# Altium PCB SensorNode.PcbDoc (part 1 of 2)
Units mil, origin at the board's own origin, x right, y up, seen from the top; angles counter-clockwise.
Board outline 2244.09 x 2204.72 mil, 4 copper layers (Top Copper, POWER, GND, Bottom Copper), stack 61.811 mil thick; 83 components, 70 nets, 369 pads, 414 vias.
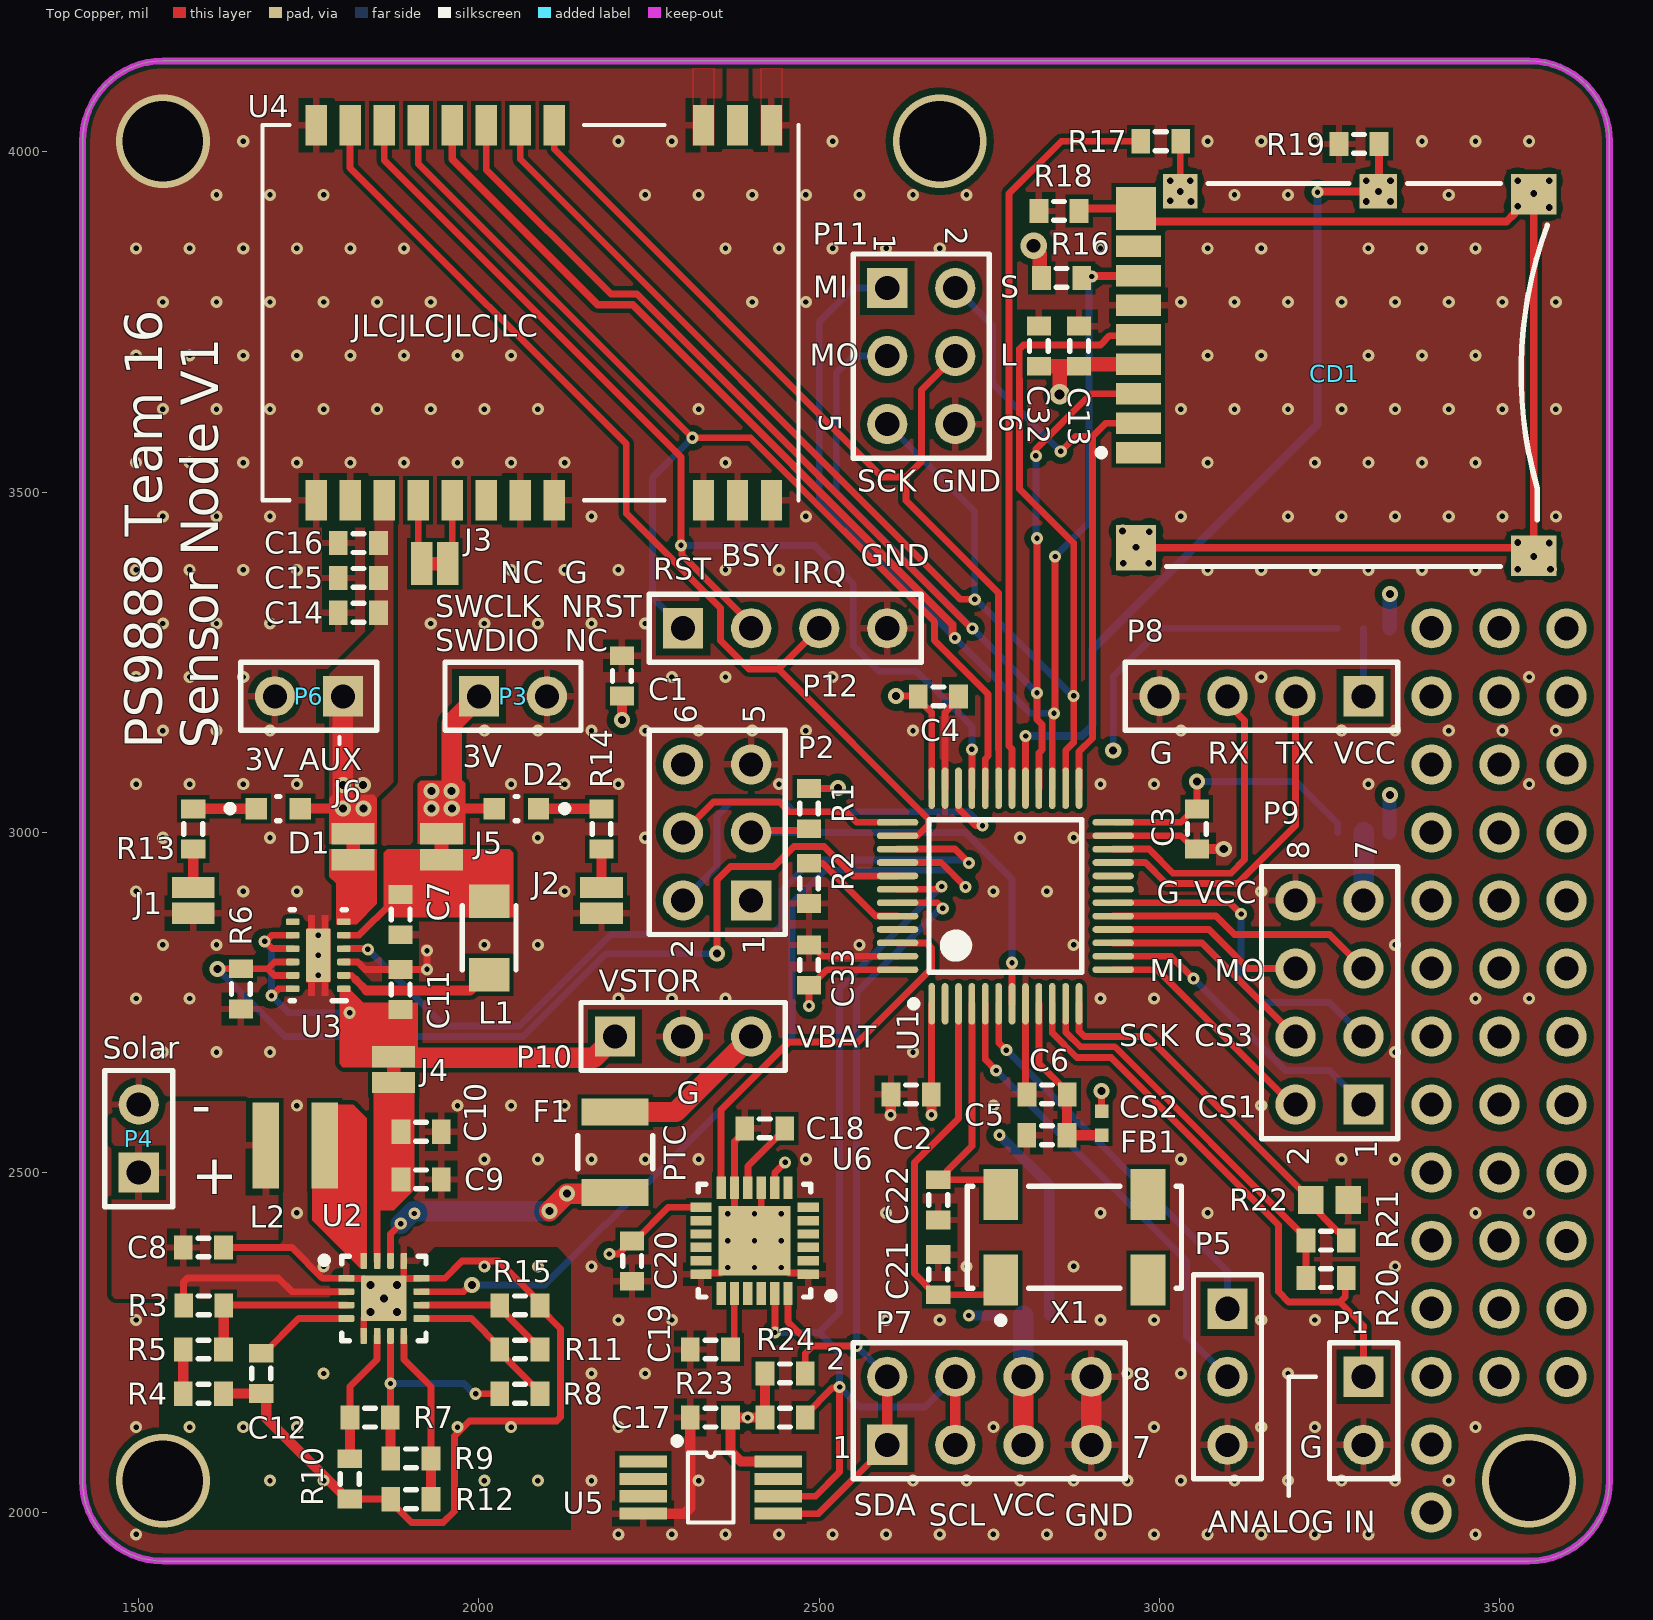
[diagram p0: Top Copper view]
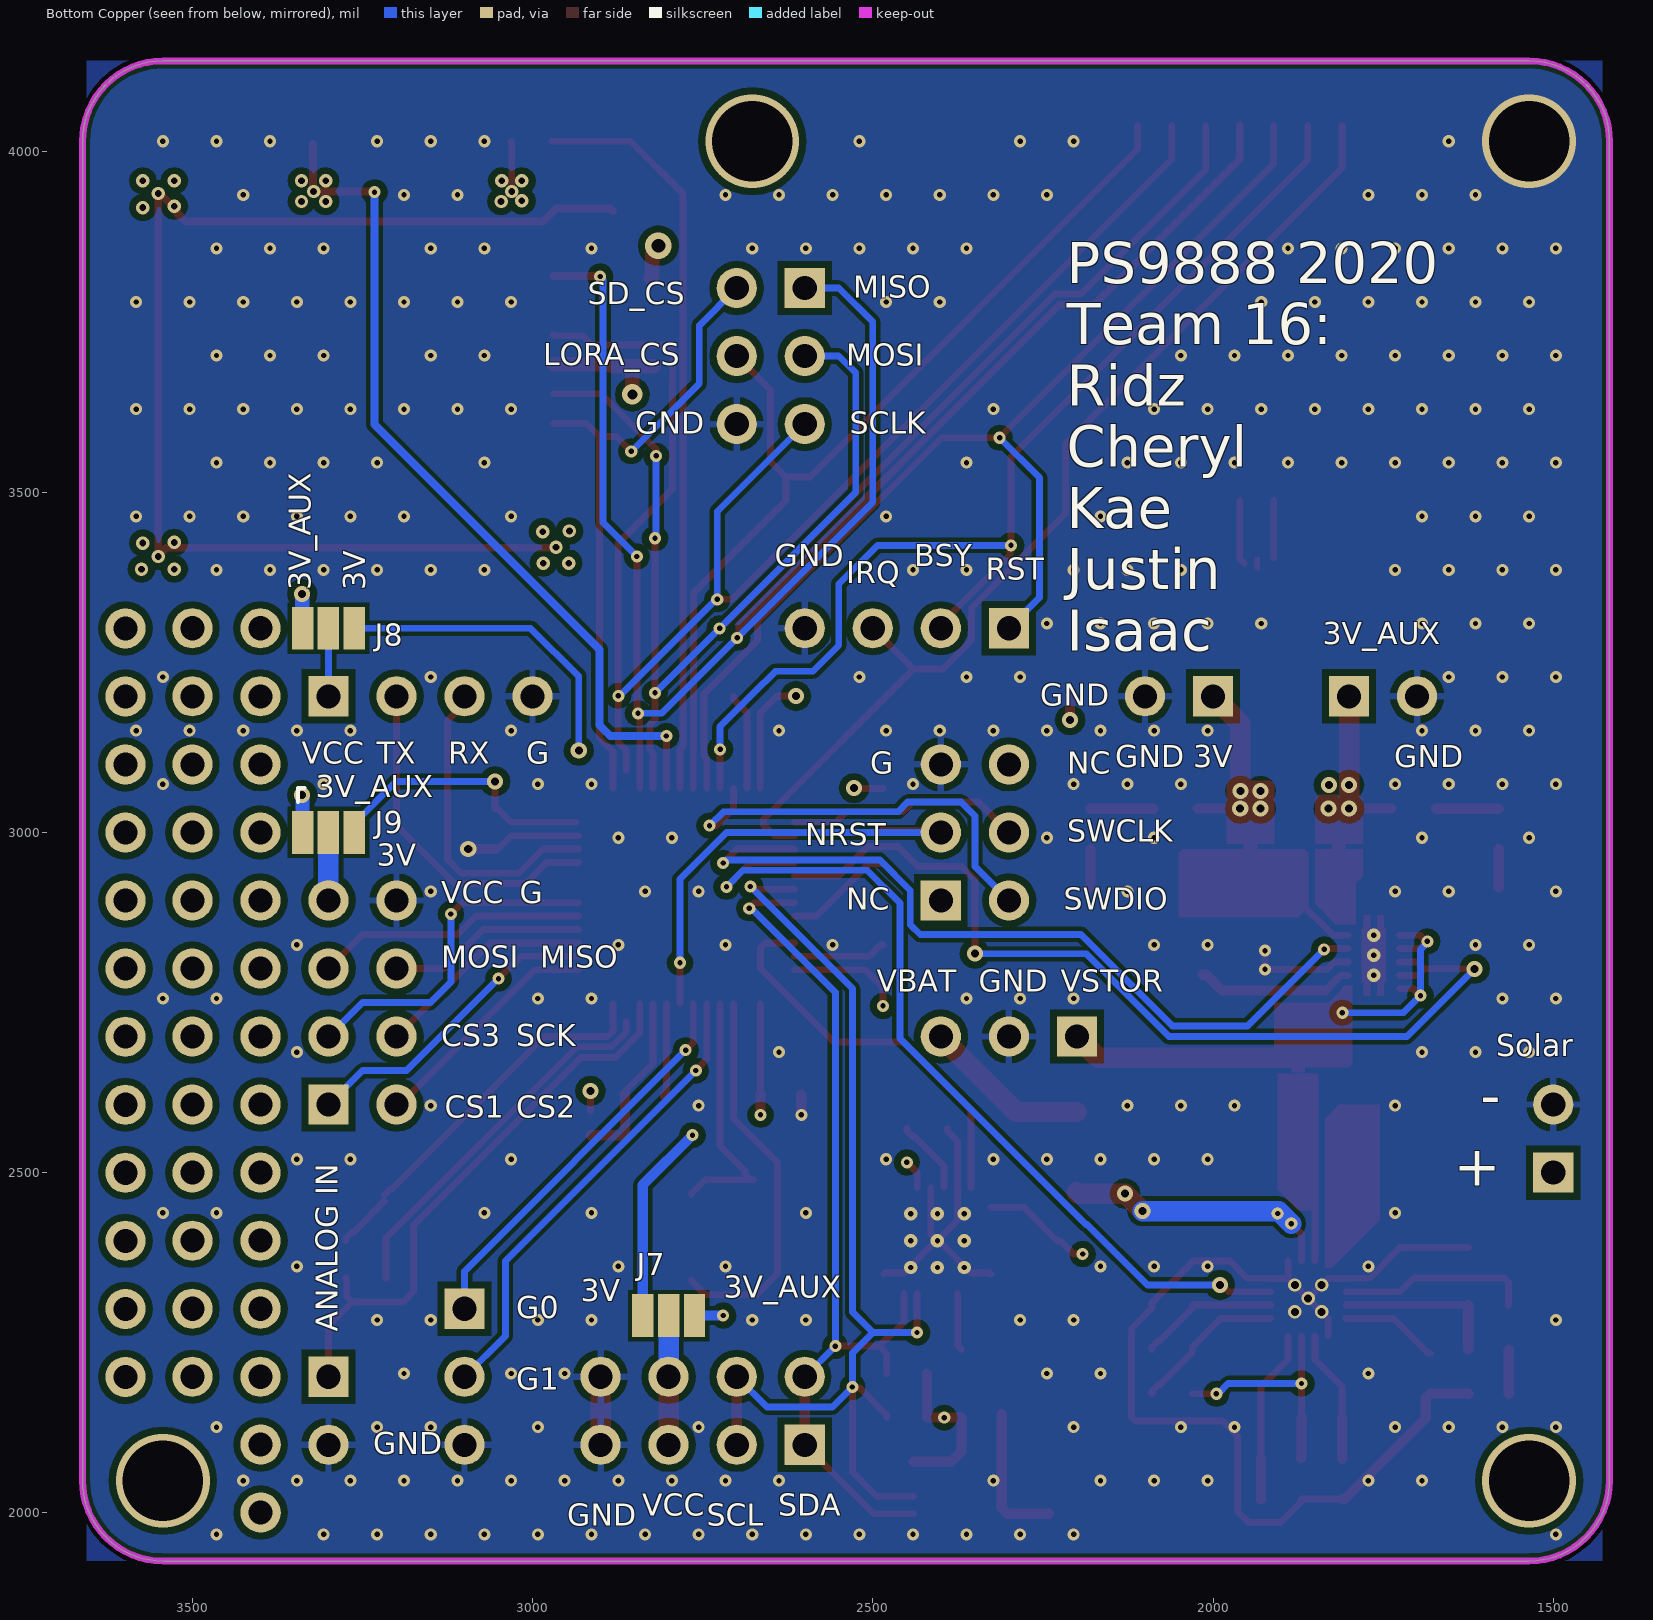
[diagram p1: Bottom Copper view, seen from below]
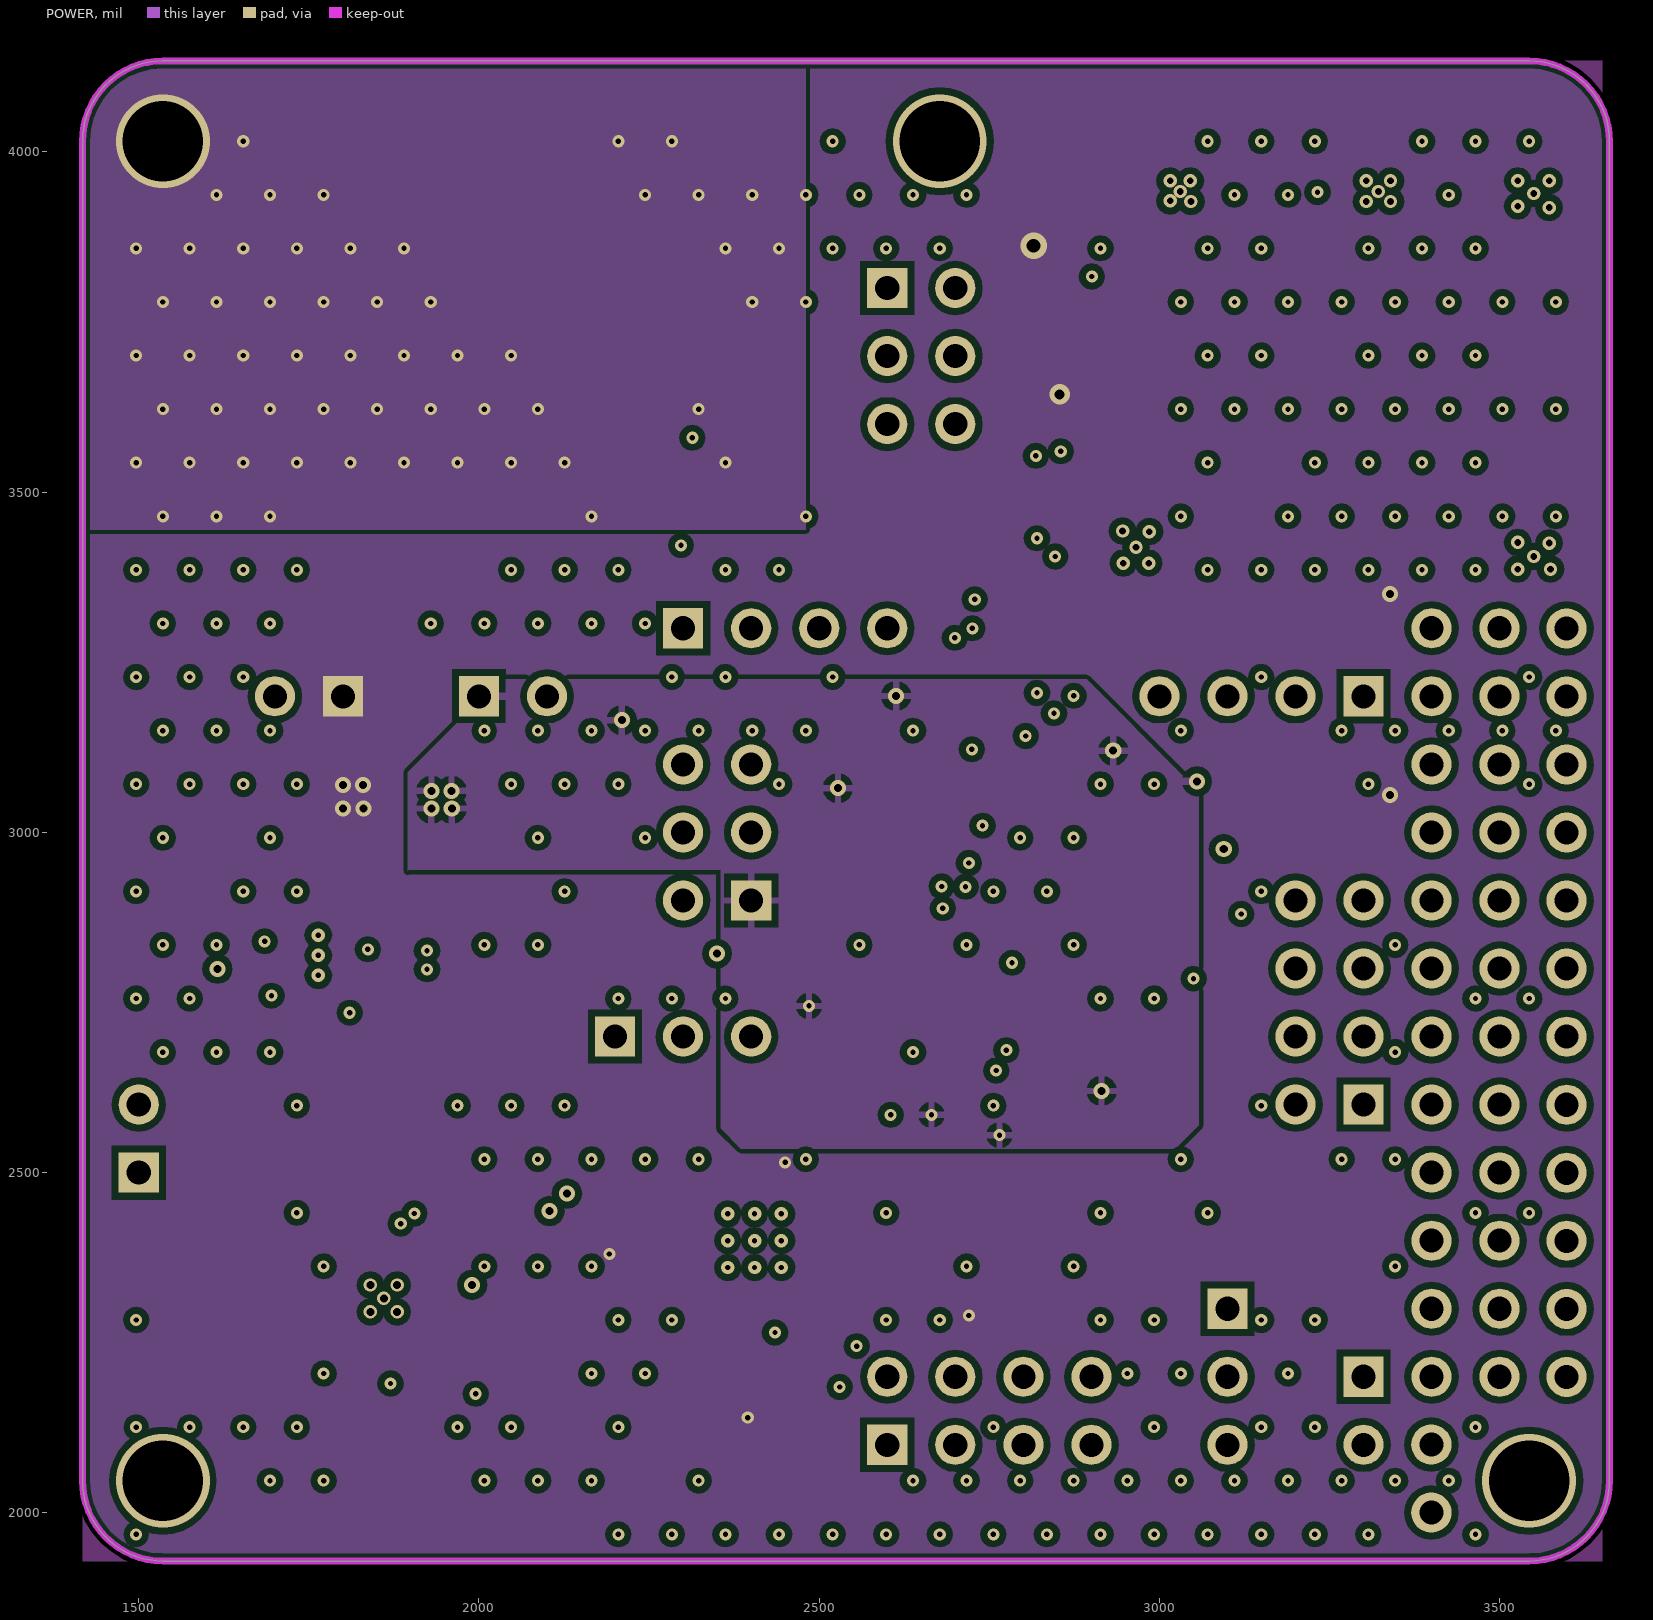
[diagram p2: POWER]
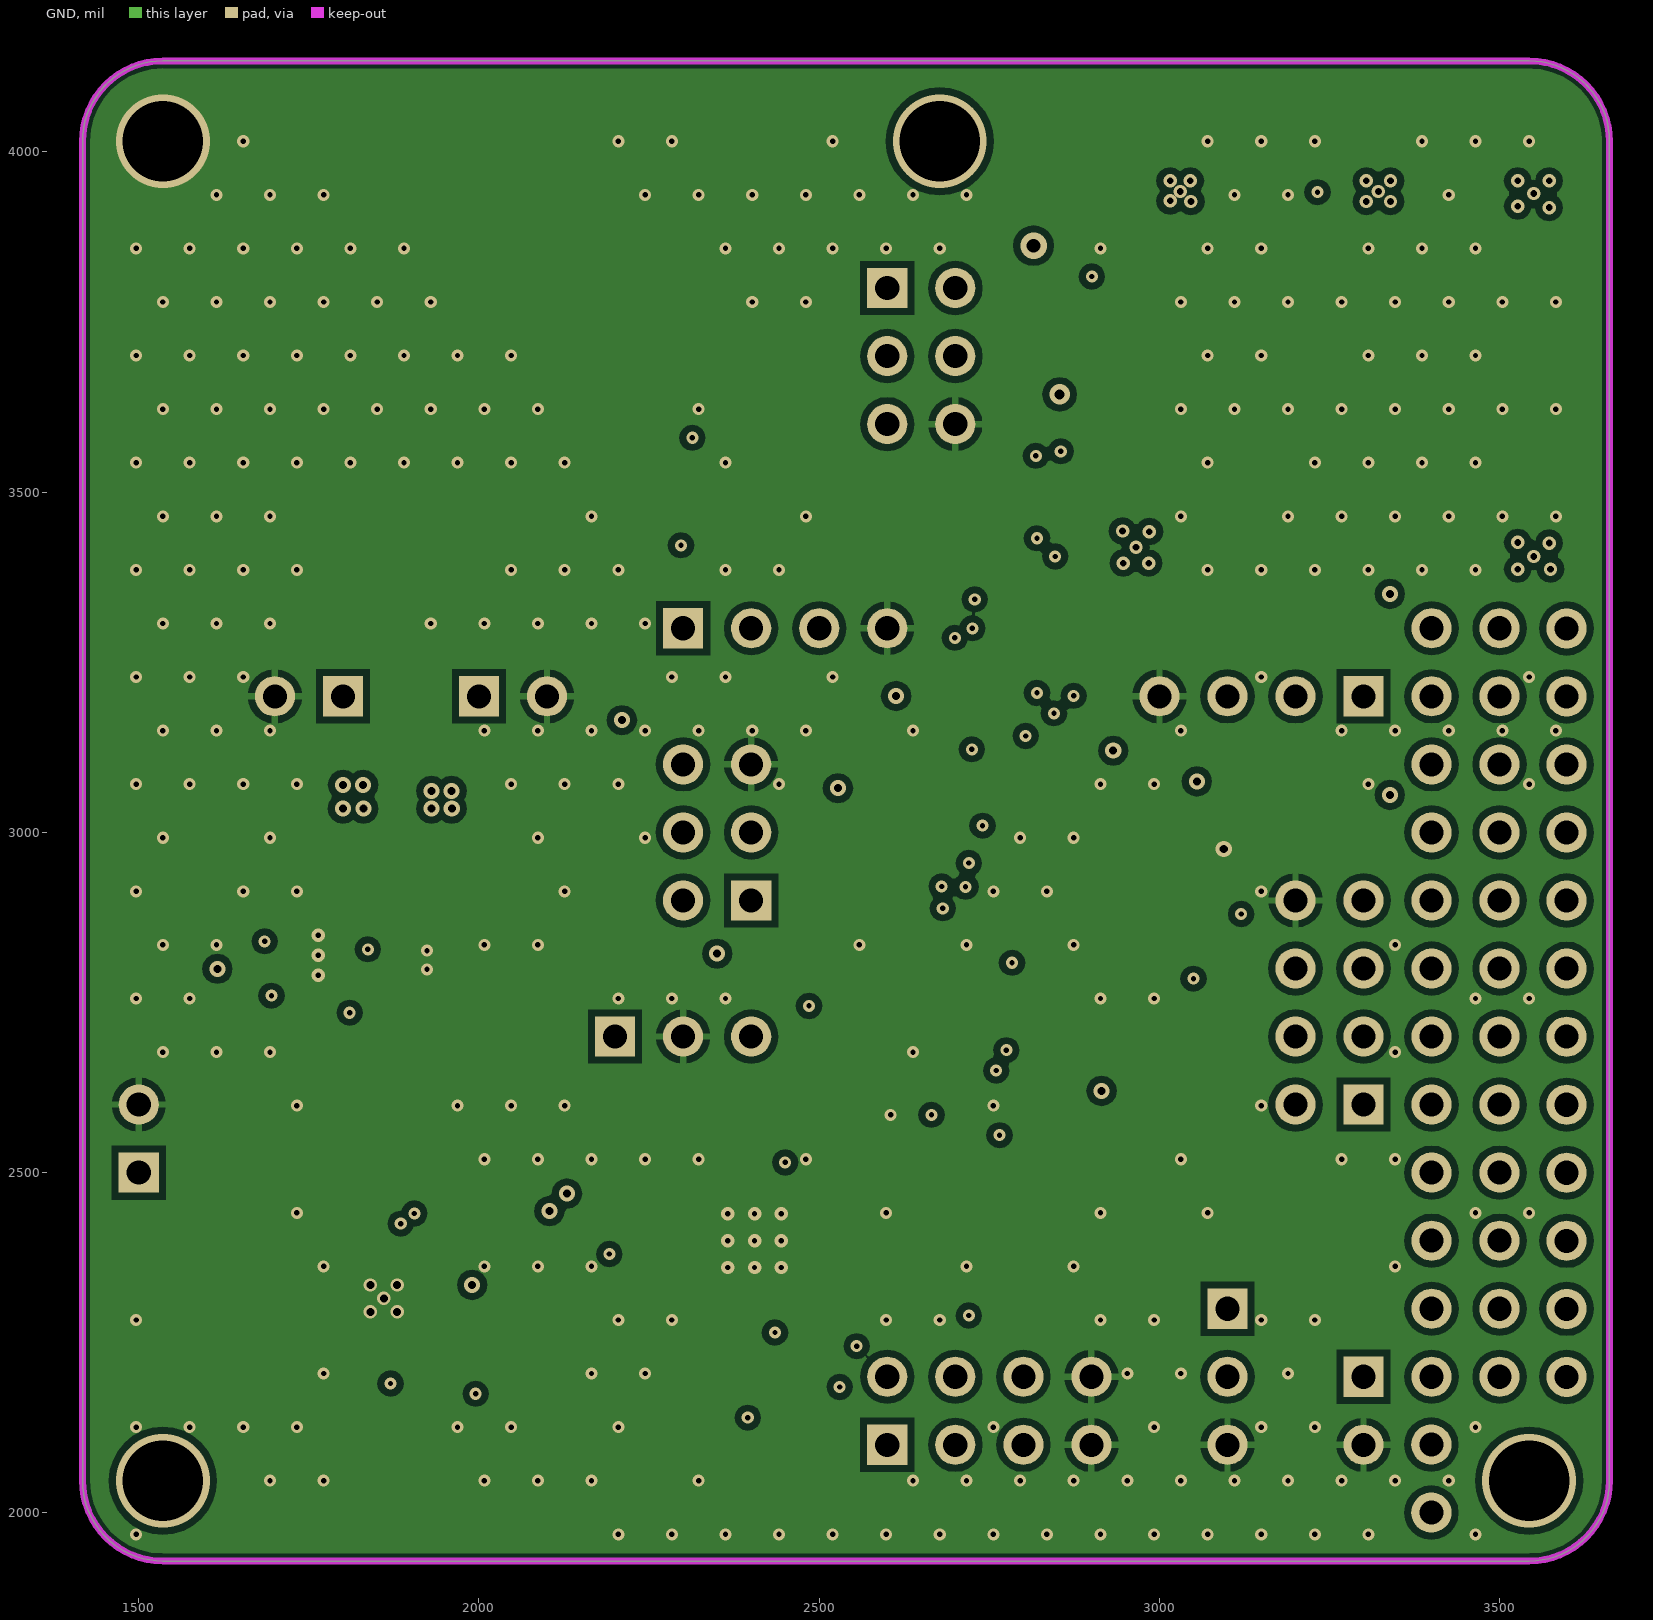
[diagram p3: GND]

## Layer stack, top to bottom
Top Mask: solder mask 0.5906, Solder Resist, Dk 3.8
Top Copper: signal copper 1.378
Dielectric 1: prepreg 7.874, 7628, Dk 4.6
POWER: signal copper 0.689
Core: core 41.9291, FR-4, Dk 4.5
GND: signal copper 0.689
Dielectric 2: prepreg 7.874, 7628, Dk 4.6
Bottom Copper: signal copper 1.378
Bottom Mask: solder mask 0.5906, Solder Resist, Dk 3.8

## Board outline
1535.43,1929.13 cw(c1535.43,2047.24) 1417.32,2047.24 1417.32,4015.75 cw(c1535.43,4015.75) 1535.43,4133.86 3543.31,4133.86 cw(c3543.31,4015.75) 3661.42,4015.75 3661.42,2047.24 cw(c3543.31,2047.24) 3543.31,1929.13

## Design rules (kind name [scope] priority, off if disabled: settings)
Clearance [All] p1: gap=10 ignorepadtopadclearanceinfootprint=FALSE except(0: Arc-Hole Track-Hole SMDPad-Hole THPad-Hole Via-Hole Fill-Hole Poly-Hole Region-Hole Text-Hole; 5: Arc-Arc Arc-Track Track-Track; 5.91: SMDPad-SMDPad; 6: Arc-SMDPad Arc-Fill Arc-Poly Arc-Region Track-SMDPad Track-Fill Track-Poly Track-Region SMDPad-Fill SMDPad-Poly SMDPad-Region Fill-Fill Fill-Poly Fill-Region Poly-Poly Poly-Region Region-Region)
HoleSize [All] p1: absolutevalues=TRUE maxlimit=157.48 minlimit=0.98 maxpercent=80.000 minpercent=20.000
MinimumAnnularRing MinimumAnnularRing_1 [IsVia] p1: minimumring=4.88
MinimumAnnularRing [IsPad] p2: minimumring=7.87
MinimumSolderMaskSliver [All] p1 off: minsoldermaskwidth=3.94
PasteMaskExpansion [(HasFootprint('Jumper (Close)') OR HasFootprint('Jumper (Open)') OR HasFootprint('Jumper-3 (Open)'))] p1: expansion=-118.11
PasteMaskExpansion PasteMaskExpansion_1 [All] p2: expansion=0
PolygonConnect PolygonConnect_5 [IsVia vs InNet('GND')] p1: connectstyle=Direct reliefconductorwidth=10 reliefentries=4 polygonreliefangle="90 Angle" airgapwidth=10
PolygonConnect PolygonConnect_2 [InNet('ANT')] p2: connectstyle=Direct reliefconductorwidth=10 reliefentries=4 polygonreliefangle="90 Angle" airgapwidth=10
PolygonConnect PolygonConnect_4 [InNet('GND')] p3 off: connectstyle=Direct reliefconductorwidth=10 reliefentries=4 polygonreliefangle="90 Angle" airgapwidth=10
PolygonConnect PolygonConnect_3 [InNet('3V_AUX')] p4: connectstyle=Direct reliefconductorwidth=10 reliefentries=4 polygonreliefangle="90 Angle" airgapwidth=10
PolygonConnect PolygonConnect_1 [InNet('NetIC1_9') Or InNet('NetC30_2')] p5: connectstyle=Direct reliefconductorwidth=10 reliefentries=4 polygonreliefangle="90 Angle" airgapwidth=10
PolygonConnect [All] p6: connectstyle=Relief reliefconductorwidth=10 reliefentries=4 polygonreliefangle="90 Angle" airgapwidth=10
RoomDefinition "U_Sensor Ports" [InComponentClass('U_Sensor Ports')] p1: confinementstyle=ConfineIn formatcopy=TRUE lockcomponents=FALSE outline 2200,1950 3380,1950 3380,3891.73 2200,3891.73
RoomDefinition U_Power [InComponentClass('U_Power')] p2: confinementstyle=ConfineIn formatcopy=TRUE lockcomponents=FALSE outline 1445.87,1996.06 2485,1996.06 2485,3355 1445.87,3355
RoomDefinition U_mcu [InComponentClass('U_mcu')] p3: confinementstyle=ConfineIn formatcopy=TRUE lockcomponents=FALSE outline 2100,1970 3380,1970 3380,3975 2100,3975
RoomDefinition "U_SD Card" [InComponentClass('U_SD Card')] p4: confinementstyle=ConfineIn formatcopy=TRUE lockcomponents=FALSE outline 2482.28,3370 3594.49,3370 3594.49,4040.35 2482.28,4040.35
RoomDefinition U_Transceiver [InComponentClass('U_Transceiver')] p5: confinementstyle=ConfineIn formatcopy=TRUE lockcomponents=FALSE outline 1653.54,4114.17 1653.54,3277.56 2910,3277.56 2910,4114.17
RoutingVias [All] p1: holewidth=7.87 width=17.72 viastyle="Through Hole" minholewidth=7.87 minwidth=17.72 maxholewidth=23.62 maxwidth=39.37
SilkToSilkClearance [All] p1 off: silktosilkclearance=10
SilkToSolderMaskClearance [IsPad] p1: minsilkscreentomaskgap=3.94 clearancetoexposedcopper=TRUE
SolderMaskExpansion SolderMaskExpansion_1 [All] p1: expansion=4 istentingtop=FALSE
SolderMaskExpansion [IsVia] p2: expansion=4 istentingtop=TRUE
Width [All] p1: maxlimit=30 minlimit=5 preferedwidth=15 midlayer1_minwidth=10 midlayer1_maxwidth=10 midlayer1_prefwidth=10 midlayer2_minwidth=10 midlayer2_maxwidth=10 midlayer2_prefwidth=10 minimp=50.000000 maximp=50.000000 favimp=50.000000
25 further rules are at their usual default settings.

## Classes and differential pairs
component class U_Transceiver: C14 C15 C16 J3 U4
component class "U_Sensor Ports": C18 C19 C20 J7 J8 J9 P1 P7 P8 P9 R20 R21 R22 U6
component class "U_SD Card": C13 C32 CD1 R16 R17 R18 R19
component class U_Power: C7 C8 C9 C10 C11 C12 D1 D2 F1 J1 J2 J4 J5 J6 L1 L2 P3 P4 P6 P10 R3 R4 R5 R6 R7 R8 R9 R10 R11 R12 R13 R14 R15 U2 U3
component class U_mcu: C1 C2 C3 C4 C5 C6 C17 C21 C22 C33 FB1 P2 P5 P11 P12 R1 R2 R23 R24 U1 U5 X1

## Components (designator, comment, footprint, x,y, rotation, side; value= is the part's Value field where it differs from the comment)
C1 "Cap" "0603 (1608M)" 2210,3230 r270 top value=10uF
C2 "Cap" "0603 (1608M)" 2635,2615 r0 top value=100nF
C3 "Cap" "0603 (1608M)" 3055,3005 r90 top value=100nF
C4 "Cap" "0603 (1608M)" 2675,3200 r180 top value=100nF
C5 "Cap" "0603 (1608M)" 2834.53,2555 r0 top value=1uF
C6 "Cap" "0603 (1608M)" 2835,2615 r0 top value=100nF
C7 "Cap" "0603 (1608M)" 1884.84,2879.13 r90 top value=10uF
C8 "Cap" "0603 (1608M)" 1595,2390 r180 top value=4.7uF
C9 "Cap" "0603 (1608M)" 1915,2490 r180 top value=100nF
C10 "Cap" "0603 (1608M)" 1915,2560 r180 top value=4.7uF
C11 "Cap" "0603 (1608M)" 1884.84,2769.13 r270 top value=10uF
C12 "Cap" "0603 (1608M)" 1680,2205 r90 top value=10nF
C13 "Cap" "0603 (1608M)" 2881.89,3714.57 r270 top value=100nF
C14 "Cap" "0603 (1608M)" 1822.83,3322.83 r0 top value=1uF
C15 "Cap" "0603 (1608M)" 1822.83,3374.02 r0 top value=100nF
C16 "Cap" "0603 (1608M)" 1822.83,3425.2 r0 top value=10nF
C17 "Cap" "0603 (1608M)" 2340,2140 r0 top value=10nF
C18 "Cap" "0603 (1608M)" 2420,2565 r0 top value=100nF
C19 "Cap" "0603 (1608M)" 2340,2240 r0 top value=2.2nF
C20 "Cap" "0603 (1608M)" 2225,2370 r90 top value=100nF
C21 "Cap" "0603 (1608M)" 2675,2350 r270 top value=6pF
C22 "Cap" "0603 (1608M)" 2675,2460 r90 top value=6pF
C32 "Cap" "0603 (1608M)" 2822.83,3714.57 r270 top value=10uF
C33 "Cap" "0603 (1608M)" 2485,2805 r270 top value=100nF
CD1 "502774-0891" MOLX-502774-0891_V 3259.84,3672.24 r90 top
D1 "SML-D12P8WT86" FP-SML-D12-MFG 1705,3035 r0 top
D2 "SML-D12P8WT86" FP-SML-D12-MFG 2055,3035 r180 top
F1 "1210L020WR" FP-1210L-MFG 2200,2530 r270 top value=0.8-5Ω
FB1 "BLM15GG221SN1D" MURA-BLM15-CHIP-2_V 2915,2572.72 r90 top
J1 "Open Jumper" "Jumper (Open)" 1580,2900 r90 top
J2 "Open Jumper" "Jumper (Open)" 2180,2900 r90 top
J3 "Closed Jumper" "Jumper (Close)" 1935,3395 r0 top net-tie
J4 "Closed Jumper" "Jumper (Close)" 1874.48,2651.44 r90 top net-tie
J5 "Closed Jumper" "Jumper (Close)" 1944.86,2978.84 r90 top net-tie
J6 "Closed Jumper" "Jumper (Close)" 1815.03,2978.84 r90 top net-tie
J7 "3 Way Open Jumper" "Jumper-3 (Open)" 2800,2290 r180 bottom
J8 "3 Way Open Jumper" "Jumper-3 (Open)" 3300,3300 r0 bottom
J9 "3 Way Open Jumper" "Jumper-3 (Open)" 3300,3000 r0 bottom
L1 "74479787222" SMD-1008 2015,2845 r90 top
L2 "744025220" "WE-TPC 2828" 1730,2540 r0 top locked
P1 "Header 2" HDR1X2 3300,2200 r270 top
P2 "SWD" HDR2X3 2400,2900 r90 top locked
P3 "3V" HDR1X2 2000,3200 r0 top
P4 "Solar Panel Input" HDR1X2 1500,2500 r90 top
P5 "GPIO" HDR1X3 3100,2300 r270 top
P6 "3V_AUX" HDR1X2 1800,3200 r180 top
P7 "I2C" HDR2X4 2600,2100 r0 top
P8 "UART" HDR1X4 3300,3200 r180 top
P9 "Header 4X2" HDR2X4 3300,2600 r90 top
P10 "VIN" HDR1X3 2200,2700 r0 top
P11 "SPI_DEBUG" HDR2X3 2600,3800 r270 top
P12 "Header 4" HDR1X4 2300,3300 r0 top
R1 "Resistor" "0603 (1608M)" 2485,3035 r270 top value=10k
R2 "Resistor" "0603 (1608M)" 2485,2925 r90 top value=10k
R3 "Resistor" "0603 (1608M)" 1595.47,2305 r180 top value=3.92M
R4 "Resistor" "0603 (1608M)" 1595,2175 r180 top value=10M
R5 "Resistor" "0603 (1608M)" 1595,2240 r0 top value=5.9M
R6 "Resistor" "0603 (1608M)" 1650,2770 r90 top value=10k
R7 "Resistor" "0603 (1608M)" 1840,2140 r0 top value=5.62M
R8 "Resistor" "0603 (1608M)" 2060,2175 r180 top value=680k
R9 "Resistor" "0603 (1608M)" 1900,2080 r180 top value=6.19M
R10 "Resistor" "0603 (1608M)" 1810,2050 r90 top value=4.53M
R11 "Resistor" "0603 (1608M)" 2060,2240 r180 top value=6.04M
R12 "Resistor" "0603 (1608M)" 1900,2020 r0 top value=3.74M
R13 "Resistor" "0603 (1608M)" 1580,3005 r90 top value=1k
R14 "Resistor" "0603 (1608M)" 2180,3005 r90 top value=1k
R15 "Resistor" "0603 (1608M)" 2060,2305 r180 top value=3.4M
R16 "Resistor" "0603 (1608M)" 2856.3,3814.96 r180 top value=DNP
R17 "Resistor" "0603 (1608M)" 3001.97,4015.75 r0 top value=1k
R18 "Resistor" "0603 (1608M)" 2852.36,3913.39 r0 top value=DNP
R19 "Resistor" "0603 (1608M)" 3293.31,4011.81 r0 top value=DNP
R20 "Resistor" "0603 (1608M)" 3245,2345 r180 top value=4.7k
R21 "Resistor" "0603 (1608M)" 3245,2400 r180 top value=4.7k
R22 "ERT-J1VR103J" RESC1608X90X30ML15T20 3250,2460 r180 top
R23 "Resistor" "0603 (1608M)" 2450,2140 r180 top value=1.5k
R24 "Resistor" "0603 (1608M)" 2450,2205 r180 top value=1.5k
U1 "STM32L051C8T6" STM-LQFP48_L 2773.58,2906.54 r90 top
U2 "BQ25504RGTT" RGT0016C_V 1860.12,2315.16 r0 top
U3 "TPS62740DSST" DSS0012A_V 1763.76,2819.37 r180 top
U4 "E22-900M22S" E22-900M22S 2469.29,3488.19 r90 top locked
U5 "M24M01" TSSOP-8 2241.18,2075.59 r0 top
U6 "MPU6050" INSE-QFN-24_V 2405,2400 r180 top
X1 "ABS25-32.768KHZ-6-T" ABRA-ABS25-4_V 2875,2405 r0 top

## Footprints (in the part's own frame and the unit in brackets; to place one, negate y for a bottom-side part, rotate by r counter-clockwise, add the part's x,y. Pads: shape width x height; smd on the part's side, far side on the other; paste and mask are expansions set on the pad)
"0603 (1608M)" [mm] "Chip Resistor, Body 1.6x0.8mm, IPC High Density"
  rect 0.7x0.9 smd: 1(-0.75,0) 2(0.75,0)
  silkscreen extent -0.2,-0.35 0.2,0.35, body extent -0.85,-0.48 0.85,0.48, height 0.9
ABRA-ABS25-4_V [mm] "SMD, 4-Leads, Body 8x3.8mm, Pitch 5.5mm, Height 2.5mm"
  rect 1.3x1.9 smd: 1(-2.75,-1.6) 2(2.75,-1.6) 3(2.75,1.6) 4(-2.75,1.6)
  silkscreen extent -4,-3.22 4,1.9, body extent -4,-2 4,2, height 2.66
DSS0012A_V [mm] "SON, 12-Leads, Body 2x3mm, Pitch 0.5mm, Thermal Pad 2x0.9mm, TI Recommended"
  rrect40% 0.5x0.25 smd: 1(-0.95,1.25) 2(-0.95,0.75) 3(-0.95,0.25) 4(-0.95,-0.25) 5(-0.95,-0.75) 6(-0.95,-1.25) 7(0.95,-1.25) 8(0.95,-0.75) 9(0.95,-0.25) 10(0.95,0.25) 11(0.95,0.75) 12(0.95,1.25)
  rrect11% 0.9x2 smd paste-0.45: 13(0,0)
  Top Copper region: -0.375,-1.5 -0.375,-1 -0.45,-1 -0.45,1 -0.375,1 -0.375,1.5 -0.125,1.5 -0.125,1 0.125,1 0.125,1.5 0.375,1.5 0.375,1 0.45,1 0.45,-1 0.375,-1 0.375,-1.5 0.125,-1.5 0.125,-1 -0.125,-1 -0.125,-1.5
  silkscreen extent -1.05,-1.7 1.05,1.7, body extent -1,-1.5 1,1.5, height 0.8
E22-900M22S [mm]
  rect 1.5x0.8 smd: 1(0,1) 2(0,2.27) 3(0,3.54) 4(0,9.11) 5(0,10.38) 6(0,11.65) 7(0,12.92) 8(0,14.19) 9(0,15.46) 10(0,16.73) 11(0,18) 12(14,18) 13(14,16.73) 14(14,15.46) 15(14,14.19) 16(14,12.92) 17(14,11.65) 18(14,10.38) 19(14,9.11) 20(14,3.54) 21(14,2.27) 22(14,1)
  silkscreen extent 0,0 14,20
FP-1210L-MFG [mm]
  rect 1x2.5 smd paste+0 mask+0: 1(-1.5,0) 2(1.5,0)
  silkscreen extent -0.63,-1.4 0.63,1.4, body extent -2.1,-1.5 2.1,1.5, height 0.25
FP-SML-D12-MFG [mm]
  rect 0.8x0.8 smd paste+0 mask+0: 1(-0.825,0) 2(0.825,0)
  silkscreen extent -1.92,-0.45 0.05,0.45, body extent -1.33,-0.55 1.33,0.55, height 0.25
HDR1X2 [mm] "Connector; Header; 2 Position"
  rect 1.5x1.5 hole 0.9: 1(0,0)
  round 1.5 hole 0.9: 2(2.54,0)
  silkscreen extent -1.27,-1.27 3.81,1.27
HDR1X3 [mm] "Connector; Header; 3 Position"
  rect 1.5x1.5 hole 0.9: 1(0,0)
  round 1.5 hole 0.9: 2(2.54,0) 3(5.08,0)
  silkscreen extent -1.27,-1.27 6.35,1.27
HDR1X4 [mm] "Connector; Header; 4 Position"
  rect 1.5x1.5 hole 0.9: 1(0,0)
  round 1.5 hole 0.9: 2(2.54,0) 3(5.08,0) 4(7.62,0)
  silkscreen extent -1.27,-1.27 8.89,1.27
HDR2X3 [mm] "Connector; Header; 3x2 Position"
  rect 1.5x1.5 hole 0.9: 1(0,0)
  round 1.5 hole 0.9: 2(0,2.54) 3(2.54,0) 4(2.54,2.54) 5(5.08,0) 6(5.08,2.54)
  silkscreen extent -1.27,-1.27 6.35,3.81
HDR2X4 [mm] "Connector; Header; 4x2 Position"
  rect 1.5x1.5 hole 0.9: 1(0,0)
  round 1.5 hole 0.9: 2(0,2.54) 3(2.54,0) 4(2.54,2.54) 5(5.08,0) 6(5.08,2.54) 7(7.62,0) 8(7.62,2.54)
  silkscreen extent -1.27,-1.27 8.89,3.81
INSE-QFN-24_V [mm] "QFN, 24-Leads, Body 4.00x4.00mm, Pitch 0.50mm, Thermal Pad 2.7x2.6mm"
  rect 0.8x0.35 smd: 1(-2,1.25) 2(-2,0.75) 3(-2,0.25) 4(-2,-0.25) 5(-2,-0.75) 6(-2,-1.25) 13(2,-1.25) 14(2,-0.75) 15(2,-0.25) 16(2,0.25) 17(2,0.75) 18(2,1.25)
  rect 0.35x0.85 smd: 7(-1.25,-1.975) 8(-0.75,-1.975) 9(-0.25,-1.975) 10(0.25,-1.975) 11(0.75,-1.975) 12(1.25,-1.975) 19(1.25,1.975) 20(0.75,1.975) 21(0.25,1.975) 22(-0.25,1.975) 23(-0.75,1.975) 24(-1.25,1.975)
  rect 2.7x2.6 smd: 25(0,0)
  silkscreen extent -2.98,-2.1 2.1,2.17, body extent -2,-2 2,2, height 0.95
"Jumper (Close)" [mm]
  rect 0.8x1.6 smd: 1(-0.483,0) 2(0.483,0)
  Top Copper region: -0.102,-0.254 0.102,-0.254 0.102,0.254 -0.102,0.254
"Jumper (Open)" [mm]
  rect 0.8x1.6 smd: 1(-0.483,0) 2(0.483,0)
"Jumper-3 (Open)" [mm]
  rect 0.8x1.6 smd: 1(-0.965,0) 2(0,0) 3(0.965,0)
MOLX-502774-0891_V [mm] "SMD, 14-Leads, Body 15x14.3mm, Pitch 1.1mm"
  rect 0.8x1.68 smd: 1(-2.9,7.385) 2(-1.8,7.385) 3(-0.7,7.385) 4(0.4,7.385) 5(1.5,7.385) 6(2.6,7.385) 7(3.7,7.385) 8(4.8,7.385)
  rect 1.29x1.3 smd: 9(6.855,5.825)
  rect 1.29x1.4 smd: 10(6.855,-1.575)
  rect 1.5x1.7 smd: 11(6.75,-7.375) 12(-6.75,-7.375)
  rect 1.7x1.5 smd: 13(-6.45,7.475)
  rect 1.6x1.5 smd: 14(6.21,7.475)
  silkscreen extent -7.15,-7.88 7.15,8.9, body extent -7.15,-8 7.15,8, height 1.78
MURA-BLM15-CHIP-2_V [mm] "Chip Ferrite Bead, 2-Leads, Body 1x0.5mm"
  rect 0.5x0.5 smd: 1(-0.45,0) 2(0.45,0)
  body extent -0.52,-0.28 0.53,0.28, height 0.55
RESC1608X90X30ML15T20 [mm] "Chip Resistor, 2-Leads, Body 1.60x0.80mm, IPC Low Density"
  rect 0.95x1.05 smd: 1(-0.7,0) 2(0.7,0)
  body extent -0.88,-0.48 0.87,0.48, height 0.9
RGT0016C_V [mm] "QFN, 16-Leads, Body 3x3mm, Pitch 0.5mm, Thermal Pad 1.65x1.65mm"
  rrect40% 0.6x0.25 smd: 1(-1.4,0.75) 2(-1.4,0.25) 3(-1.4,-0.25) 4(-1.4,-0.75) 9(1.4,-0.75) 10(1.4,-0.25) 11(1.4,0.25) 12(1.4,0.75)
  rrect40% 0.25x0.6 smd: 5(-0.75,-1.4) 6(-0.25,-1.4) 7(0.25,-1.4) 8(0.75,-1.4) 13(0.75,1.4) 14(0.25,1.4) 15(-0.25,1.4) 16(-0.75,1.4)
  rrect6% 1.55x1.55 on Top Paste: 17(0,0)
  rrect6% 1.7x1.7 smd paste-0.85: 17(0,0)
  silkscreen extent -2.35,-1.57 1.57,1.58, body extent -1.5,-1.5 1.5,1.5, height 1
SMD-1008 [mm] "Chip Inductor, 2-Leads, Body 2.5x2.0x1.1 mm"
  rect 1.25x1.5 smd: 1(-1.375,0) 2(1.375,0)
  silkscreen extent -1.2,-1 1.2,1, body extent -1.25,-1 1.25,1, height 0.89
STM-LQFP48_L [mm] "QFP, 48-Leads, Body 7x7mm, Pitch 0.5mm, IPC High Density"
  oval 1.55x0.25 smd: 1(-4.025,2.75) 2(-4.025,2.25) 3(-4.025,1.75) 4(-4.025,1.25) 5(-4.025,0.75) 6(-4.025,0.25) 7(-4.025,-0.25) 8(-4.025,-0.75) 9(-4.025,-1.25) 10(-4.025,-1.75) 11(-4.025,-2.25) 12(-4.025,-2.75) 25(4.025,-2.75) 26(4.025,-2.25) 27(4.025,-1.75) 28(4.025,-1.25) 29(4.025,-0.75) 30(4.025,-0.25) 31(4.025,0.25) 32(4.025,0.75) 33(4.025,1.25) 34(4.025,1.75) 35(4.025,2.25) 36(4.025,2.75)
  oval 0.25x1.55 smd: 13(-2.75,-4.025) 14(-2.25,-4.025) 15(-1.75,-4.025) 16(-1.25,-4.025) 17(-0.75,-4.025) 18(-0.25,-4.025) 19(0.25,-4.025) 20(0.75,-4.025) 21(1.25,-4.025) 22(1.75,-4.025) 23(2.25,-4.025) 24(2.75,-4.025) 37(2.75,4.025) 38(2.25,4.025) 39(1.75,4.025) 40(1.25,4.025) 41(0.75,4.025) 42(0.25,4.025) 43(-0.25,4.025) 44(-0.75,4.025) 45(-1.25,4.025) 46(-1.75,4.025) 47(-2.25,4.025) 48(-2.75,4.025)
  silkscreen extent -4.15,-2.85 2.85,3.55, body extent -3.5,-3.5 3.5,3.5, height 1.6
TSSOP-8 [mm]
  rect 1.78x0.45 smd: 1(0,0) 2(0,-0.65) 3(0,-1.3) 4(0,-1.95) 5(5.05,-1.95) 6(5.05,-1.3) 7(5.05,-0.65) 8(5.05,0)
  silkscreen extent 1.14,-2.28 3.37,0.89, body extent -0.13,-2.47 4.73,0.53, height 1
"WE-TPC 2828" [mm] "SMD Inductor, 2-Leads, Body 2,8x2,8mm"
  rect 1x3.2 smd: 1(-1.1,0) 2(1.1,0)
  body extent -1.4,-1.4 1.4,1.4, height 2.79

## Part data
C1 C2 C3 C4 C6 C7 C8 C9 C10 C11 C13 C14 C15 C16 C17 C18 C19 C20 C21 C22 C32 C33: "Capacitor", Voltage=6.3V
C5: "Capacitor", Voltage=25V
C12: "Capacitor", Voltage=50V
CD1: library part CMP-2000-05248-1, "Micro SD Memory Card Connector, 0.5 A, 10 V (DC), -25 to 85 degC, 8-Pin SMT, RoHS, Tape and Reel", Manufacturer=Molex, Standard Package=1, 3D Model=502774-0891.stp, Card Type=SecureDigital-microSD™, Catalog Drawings=502774-0891, Category=Connectors,Interconnects, Connector Type=ConnectorandEjector, Contact Finish=Gold, Contact Finish Thickness=20µin(0.51µm), Datasheet URL=https://datasheet.ciiva.com/1104/1499551-1104671.pdf, Datasheet Version="Rev. D, 04/2004", Ejector Side=-, Family=MemoryConnectors-PCCardSockets, Features=Switch, Height Above Board="0.071\"(1.80mm)", Insertion, Removal Method=PushIn,PushOut, Manufacturer URL=http://www.molex.com/, Mounting Feature=Reverse-Bottom, Mounting Type=SurfaceMount,RightAngle, Number of Positions=10(8+2), Online Catalog=microSD™Series, Other Names=WM24066DKR, Packaging=Digi-Reel, RoHS Information=502774-0891CertofCompliance, Series=502774
D1 D2: library part CMP-08952-000019-1, "LED GREEN DIFFUSED 0603 SMD", Colour=Green, Forward Current=20mA, Forward Voltage=2.2V, Manufacturer=Rohm, Package=SML-D12, Power Dissipation=54mW, Reverse Voltage=5V, Temperature="-40°C to +85°C", Temperature Range High=+85°C, Temperature Range Low=-40°C, Automotive=No, Category=Diode, ComponentLink2Description=Datasheet, ComponentLink2URL=https://d1d2qsbl8m0m72.cloudfront.net/en/products/databook/datasheet/opto/led/chip_mono/sml-d12x8_d13x8-e.pdf, Device Class L1=Optoelectronics, Device Class L2=LEDs, Device Class L3=unset, Digikey Description="LED GREEN DIFFUSED 0603 SMD", Height=0.65mm, Lead Free=Yes, Led Orientation="Top View", Luminous Intensity=6.3mcd, Manufacturer Part Number=SML-D12P8WT86, Mouser Description="SML-D12 Series Green 0603 Diffused 6.3 mcd 2.2 V Surface Mount LED", Octopart=https://octopart.com/sml-d12p8wt86-rohm-9289138, RoHS=TRUE, Wavelength=560nm
F1: library part CMP-08606-000032-1, "PTC RESET FUSE 30V 200MA 1210", Ambient Temperature Range High=+85°C, Ambient Temperature Range Low=-40°C, Current Rating=10A, Hold Current=0.2A, Manufacturer=Littelfuse, Package=1210L, Resistance=0.8-5Ω, Temperature="-40°C to +85°C", Trip Current=0.4A, Voltage Rating=30V, Automotive=No, Category=Fuse, ComponentLink2Description=Datasheet, ComponentLink2URL=https://m.littelfuse.com/~/media/electronics/datasheets/resettable_ptcs/littelfuse_ptc_1210l_datasheet.pdf.pdf, Device Class L1="Circuit Protection", Device Class L2="PTC Resettable Fuses", Device Class L3=unset, Digikey Description="PTC RESET FUSE 30V 200MA 1210", Height=1mm, Lead Free=Yes, Manufacturer Part Number=1210L020WR, Mouser Description="PTC Resettable Fuse 0.2A(hold) 0.4A(trip) 30VDC 10A 0.6W 0.02s 0.8Ohm SMD Solder Pad 1210 T/R", Octopart=https://octopart.com/1210l020wr-littelfuse-673644, RoHS=TRUE, Temperature Range High=+85°C, Temperature Range Low=-40°C, Trip Time=0.02s
FB1: library part CMP-0686-00164-3, "Chip Ferrite Bead for High-GHz Band General Use, 220 Ohm, 300 mA, -55 to 125 degC, 1 x 0.5 x 0.55 mm SMD, Tape and Reel", DC Resistance="0.7 Ohm Max.", Manufacturer=Murata, Operating Temperature Range="-55 to 125 degC", Rated Current="300 mA", ComponentLink1Description="Manufacturer URL", ComponentLink1URL=http://www.murata.com/, ComponentLink2Description=Datasheet, ComponentLink2URL=http://www.murata.com/products/catalog/pdf/c31e.pdf, ComponentLink3Description="Package Specification", ComponentLink3URL=http://www.murata.com/products/catalog/pdf/c31e.pdf, DatasheetVersion=08/2013, Impedance (at 100 MHz)="220 Ohm +/- 25%", Mounting Technology="Surface Mount", PackageDescription="2-Pin Chip, Body 1 x 0.5 mm", PackageReference=BLM15-2, Packing="Tape and Reel", Parameter 1="220R @ 100MHz", PartNumber=BLM15GG221SN1D
J1 J2: library part "Jumper (Open)"
J3 J4 J5 J6: library part "Jumper (Closed)"
J7 J8 J9: library part "Jumper-3 (Open)"
L1: library part CMP-1392-00018-1, "Power Multilayer Inductor WE-PMI, L=2.20 µH", Inductance="2.20 ÂµH", Manufacturer="Wuerth Elektronik", ComponentLink1Description="Manufacturer URL", ComponentLink1URL=http://www.we-online.com, ComponentLink2Description=Datasheet, ComponentLink2URL=http://www.we-online.de/katalog/media/pdf/74479787222A.pdf, PackageReference=SMD-1008, Parameter 1=2.2uH, Parameter 2=1.5A, PartNumber=74479787222
L2: library part CMP-1479-00015-1, "SMD Shielded Tiny Power Inductor WE-TPC, L=22.0 µH", Current=500mA, Inductance="22.0 ÂµH", Manufacturer="Wuerth Elektronik", ComponentLink1Description="Manufacturer URL", ComponentLink1URL=http://www.we-online.com, ComponentLink2Description=Datasheet, ComponentLink2URL=http://www.we-online.de/katalog/media/pdf/744025220.pdf, PackageReference="WE-TPC 2828", PartNumber=744025220
P1: "Header, 2-Pin", LatestRevisionDate=17-Jul-2002, LatestRevisionNote="Re-released for DXP Platform.", Publisher="Altium Limited"
P2 P11: library part "Header 3X2", "Header, 3-Pin, Dual row", LatestRevisionDate=17-Jul-2002, LatestRevisionNote="Re-released for DXP Platform.", Publisher="Altium Limited"
P3 P6: library part "Header 2", "Header, 2-Pin", LatestRevisionDate=17-Jul-2002, LatestRevisionNote="Re-released for DXP Platform.", Publisher="Altium Limited"
P4: library part "Header 2", LatestRevisionDate=17-Jul-2002, LatestRevisionNote="Re-released for DXP Platform.", Publisher="Altium Limited"
P5 P10: library part "Header 3", "Header, 3-Pin", LatestRevisionDate=17-Jul-2002, LatestRevisionNote="Re-released for DXP Platform.", Publisher="Altium Limited"
P7: library part "Header 4X2", "Header, 4-Pin, Dual row", LatestRevisionDate=17-Jul-2002, LatestRevisionNote="Re-released for DXP Platform.", Publisher="Altium Limited"
P8: library part "Header 4", "Header, 4-Pin", LatestRevisionDate=17-Jul-2002, LatestRevisionNote="Re-released for DXP Platform.", Publisher="Altium Limited"
P9: "Header, 4-Pin, Dual row", LatestRevisionDate=17-Jul-2002, LatestRevisionNote="Re-released for DXP Platform.", Publisher="Altium Limited"
P12: "Header, 4-Pin", LatestRevisionDate=17-Jul-2002, LatestRevisionNote="Re-released for DXP Platform.", Publisher="Altium Limited"
R1 R2 R6 R13 R14 R16 R17 R18 R19 R20 R21 R23 R24: Tolerance=5%, LatestRevisionDate=17-Jul-2002, LatestRevisionNote="Re-released for DXP Platform.", PackageDescription="Axial Device, Thru-Hole; 2 Leads; 0.3 in Pin Spacing", PackageReference=AXIAL-0.3, Published=8-Jun-2000, Publisher="Altium Limited"
R3 R4 R5 R7 R8 R9 R10 R11 R12 R15: Tolerance=1%, LatestRevisionDate=17-Jul-2002, LatestRevisionNote="Re-released for DXP Platform.", PackageDescription="Axial Device, Thru-Hole; 2 Leads; 0.3 in Pin Spacing", PackageReference=AXIAL-0.3, Published=8-Jun-2000, Publisher="Altium Limited"
R22: library part CMP-2000-00869-1, Manufacturer=Panasonic, Part Number=ERT-J1VR103J
U1: library part CMP-1546-00003-1, "Ultra-Low-Power ARM Cortex-M0+ MCU, 64 KB Flash, 1.8 to 3.6 V, -40 to 85 degC, 48-Pin LQFP, RoHS, Tray", Temperature Max="85 degC", Temperature Min="-40 degC", ComponentLink1Description="Manufacturer URL", ComponentLink1URL=http://www.st.com/web/en/home.html, ComponentLink2Description=Datasheet, ComponentLink2URL=http://www.st.com/st-web-ui/static/active/en/resource/technical/document/datasheet/DM00108219.pdf, ComponentLink3Description="Package Specification", ComponentLink3URL=http://www.st.com/st-web-ui/static/active/en/resource/technical/document/datasheet/DM00058181.pdf, Data EEPROM="2 KB", DatasheetVersion="Rev. 4", Flash="64 KB", Mounting Technology="Surface Mount", PackageDescription="48-Pin Frame Chip Scale Package, Body 7 x 7 mm, Pitch 0.5 mm", Packing=Tray, PartNumber=STM32L051C8T6, RAM="8 KB", RoHS=TRUE, VDD Max="3.6 V", VDD Min="1.8 V"
U2: library part CMP-0321-00258-2, "Ultra Low Power Boost Converter with Battery Management for Energy Harvester App, 0.13 V, -40 to 85 degC, 16-pin QFN (RGT), Green (RoHS & no Sb/Br)", Manufacturer="Texas Instruments", Over Voltage Protection=N, Code_JEDEC=MO-220, ComponentLink1Description=Datasheet, ComponentLink1URL=http://www.ti.com/general/docs/lit/getliterature.tsp?genericPartNumber=BQ25504&fileType=pdf, DatasheetVersion=SLUSAH0, Eco-Plan="Green (RoHS & no Sb/Br)", Lead Acid=N, Li-Ion=N, Li-Polymer=N, Mounting Technology="Surface Mount", NiCd=N, NiMH=N, PackageDescription="16-Pin Plastic Quad Flat No-Lead, 3 x 3 mm Body, 0.5 mm Pitch, 1.7 x 1.7 mm Exposed Pad", PackageReference=RGT0016C, PackageVersion="revH, Oct-2011", PartNumber=BQ25504RGTT, SubFamily="Battery Charge Management", Vin(Min)(V)=0.13
U3: library part CMP-0323-00573-2, "Step Down Converter For Low Power Applications, 2.2 to 5.5 V VIN, -40 to 85 degC, 12-Pin WSON (DSS), RoHS, Tape and Reel", PartNumber=TPS62740, Temperature Max="85 degC", Temperature Min="-40 degC", ComponentLink1Description="Manufacturer URL", ComponentLink1URL=http://www.ti.com/, ComponentLink2Description=Datasheet, ComponentLink2URL=http://www.ti.com/lit/ds/symlink/tps62740.pdf, ComponentLink3Description="Package Specification", ComponentLink3URL=http://www.ti.com/litv/pdf/mpds336b, DatasheetVersion=SLVSB02B, Mounting Technology="Surface Mount", PackageDescription="12-Pin Plastic Small Outline, Body 3 x 2 mm, Pitch 0.5 mm", PackageReference=DSS0012A, PackageVersion="4209244/C, 07/2011", Packing="Tape and Reel", RoHS=TRUE, VIN Max="5.5 V", VIN Min="2.2 V", VOUT Max="3.3 V", VOUT Min="1.8 V"
U4: "SX1262-based Wireless Module", ComponentLink1Description="Product Page", ComponentLink1URL=http://www.ebyte.com/en/product-view-news.aspx?id=437
U5: "EEPROM Memory IC 1Mb (128K x 8) I²C 1MHz 500ns 8-TSSOP"
U6: library part CMP-1753-00002-1, "3-Axis Gyroscope, 3-Axis Accelerometer / , 2.375 to 3.46 V, -40 to 105 degC, 24-Pin QFN, RoHS, Tape and Reel", Case Code (Imperial)=0603, Case Code (Metric)=1608, Max Operating Temperature=155degC, Min Operating Temperature=-55degC, Package Quantity=5000, Power Rating="100 mW", Resistance="5.6 kohm", Tolerance=1%, Voltage Rating="75 V", Case/Package=0603, ComponentLink1Description="Manufacturer URL", ComponentLink1URL=http://www.invensense.com/, ComponentLink2Description=Datasheet, ComponentLink2URL=https://datasheet.ciiva.com/1513/1788002-1513632.pdf, DatasheetVersion="Rev. 3.4, 08/2013", Height="0.45 mm", Length="1.6 mm", Mount="Surface Mount", PackageDescription="24-Pin Quad Flat No-lead Package, Body 4 x 4 mm, Pitch 0.5 mm", PackageReference=QFN-24, Packaging="Tape and Reel", Pins=2, Radiation Hardening=No, REACH SVHC=Yes, RoHSCompliant=True, Width="0.8 mm"
X1: library part CMP-2000-05036-1, "Low Frequency Crystal, 32.768 KHz, 6 pF, +/- 20 ppm, -40 to 85 degC, 4-Pin SMD, RoHS, Tape and Reel", Case Height=2.5mm, Case Length=8mm, Case Width=3.8mm, Frequency=32.768kHz, Load Capacitance=6pF, Manufacturer=Abracon, Operating Temperature Range=-40Cto+85C, Package / Case=8mmx3.8mm, Package Description="4-Pin Surface Mount Device, Body 8 x 3.8 mm, Pitch 5.5 mm", Package Reference=ABS25, Tolerance=20PPM, Brand=ABRACON, Datasheet URL=https://datasheet.ciiva.com/854/abs25-854528.pdf, Datasheet Version=Jun-17, Dimensions=3.8mmWx8mmLx2.5mmH, ESR=50kOhms, Factory Pack Quantity=3000, Manufacturer URL=http://www.abracon.com/, Mounting Style=SMD/SMT, Packaging=Reel, Product Category=Crystals, RoHS=Details, Series=ABS25, Termination Style=SMD/SMT, Type=LowFrequencyCrystal

## Free pads (board coordinates)
  round 59.06 hole 35.43: 5(3500,2200) 5(3598.43,2199.8) 6(3399.61,2000.39) 6(3400,2200) 7(3500,2300) 7(3598.43,2299.8) 8(3399.61,2100.39) 8(3400,2300) 9(3500,2400) 9(3598.43,2399.8) 10(3400,2400) 11(3500,2500) 11(3598.43,2499.8) 12(3400,2500) 13(3500,2600) 13(3598.43,2599.8) 14(3400,2600) 15(3500,2700) 15(3598.43,2699.8) 16(3400,2700) 17(3500,2800) 17(3598.43,2799.8) 18(3400,2800) 19(3500,2900) 19(3598.43,2899.8) 20(3400,2900) 21(3500,3000) 21(3598.43,2999.8) 22(3400,3000) 23(3500,3100) 23(3598.43,3099.8) 24(3400,3100) 25(3500,3200) 25(3598.43,3199.8) 26(3400,3200) 27(3500,3300) 27(3598.43,3299.8) 28(3400,3300)

## Via types
v1: diameter 17.72, hole 7.87, Top Copper to Bottom Copper, tented both sides, 344 vias
v2: diameter 19.68, hole 9.84, Top Copper to Bottom Copper, tented both sides, 25 vias
v3: diameter 23.62, hole 11.81, Top Copper to Bottom Copper, tented both sides, 22 vias
v4: diameter 19.68, hole 7.87, Top Copper to Bottom Copper, tented both sides, 12 vias
v5: diameter 19.68, hole 11.81, Top Copper to Bottom Copper, tented both sides, 5 vias
v6: diameter 137.8, hole 118.11, Top Copper to Bottom Copper, tented both sides, 4 vias
v7: diameter 39, hole 20, Top Copper to Bottom Copper, tented both sides, 1 vias
v8: diameter 30, hole 15, Top Copper to Bottom Copper, tented both sides, 1 vias

## Nets (pads, with @x,y where several pads share a name; then routed paths per layer and width w, separated by ;. In a path a pad name is that pad's centre, name@x,y a point inside that pad or via, vN(x,y) a via of type N, cw(c..) or ccw(c..) an arc to the next point about the centre after c; other vN are vias at no path point)
3V: C1.2 C2.2 C3.2 C4.2 C33.2 D2.2 FB1.2 J5.2 J7.1 J8.1 J9.1 P2.1 P3.1 R1.1 U1.1 U1.24 U1.36 U1.48 | length 2036.1
  Top Copper w10: v1(2485,2745) C33.2@2485,2775.47 2488.94,2775.47 2511.73,2798.27 U1.48@2615.12,2798.27 ; R1.1@2485,3064.53 2527.13,3064.53 v3(2527.56,3064.96) ; v3(2613.03,3200.47) 2641.06,3200.47 2665.32,3176.22 U1.36@2665.32,3065 ; C2.2@2664.53,2615 2665.24,2615.71 2665.24,2747.99 U1.1@2665.32,2748.07 ; FB1.2@2915,2590.43 v3(2915,2620) ; U1.24@2936.43,3014.88 2936.35,3014.8 3031.34,3014.8 3051.06,3034.53 C3.2@3055,3034.53 v3(3055,3075)
  Top Copper w15: v3(1960,3035) D2.2@2022.52,3035 ; v3(2210,3165) C1.2@2210,3200.47 ; C2.2@2664.53,2615 2665,2614.53 v1(2665,2585)
  Top Copper w30: v3(1960,3035) 1960,3160 P3.1@2000,3200
  Bottom Copper w10: v3(2932.09,3120.08) 2932.09,3229.33 3002.76,3300 J8.1@3262,3300 ; v3(3055,3075) 3200.48,3075 3262,3013.48 J9.1@3262,3000
  Bottom Copper w15: v1(2765,2555) 2838,2482 J7.1@2838,2290
  other v3: 1930,3035 1930.12,3061.02 1959.65,3061.02
3V_AUX: C13.2 C14.2 C15.2 C16.2 C17.2 C20.2 C32.2 CD1.4 D1.2 J6.2 J7.3 J8.3 J9.3 P6.1 R16.2 R23.2 R24.2 U4.9 U5.8 U6.8 U6.13 | length 1066.3
  Top Copper w10: v1(2191.54,2380.38) 2204.91,2380.38 2224.53,2400 C20.2@2225,2399.53 2228.94,2399.53 2278.62,2449.21 U6.13@2326.26,2449.21 ; U6.8@2434.53,2477.76 2434.53,2499.53 v1(2450,2515)
  Top Copper w15: D1.2@1737.48,3035 v3(1800,3035) ; R24.2@2420.47,2205 R23.2@2420.47,2140 v1(2395,2140) C17.2@2369.53,2140 2369.53,2090.47 2384.41,2075.59 U5.8@2440,2075.59
  Top Copper w21: v7(2814.96,3862.2) 2814.96,3859.77 2824.28,3850.45 2824.28,3817.45 R16.2@2826.77,3814.96 ; C32.2@2822.83,3685.04 2852.36,3685.04 ; v8(2853.35,3643.7) 2853.35,3684.06 2852.36,3685.04 ; CD1.4@2969.09,3687.99 2884.84,3687.99 C13.2@2881.89,3685.04 2852.36,3685.04
  Top Copper w30: v3(1800,3035) P6.1@1800,3200
  Bottom Copper w15: v1(2720,2290) J7.3@2762.01,2290
  Bottom Copper w21: J9.3@3337.99,3000 3337.99,3054.53 v3(3338.58,3055.12) ; J8.3@3337.99,3300 3338.58,3300.59 v3(3338.62,3350.42)
  other v3: 1830,3035 1800.2,3069.88 1829.72,3069.88
3VA: C5.2 C6.2 FB1.1 U1.9 | length 261.5
  Top Copper w10: U1.9@2822.8,2748.07 2822.8,2660.67 2864.53,2618.94 C6.2@2864.53,2615
  Top Copper w15: C6.2@2864.53,2615 2864.29,2614.76 2864.29,2555.24 C5.2@2864.06,2555 FB1.1@2915,2555
ANT: U4.21